# EAGLE board Remotuino-v2 (EAGLE 6.3)
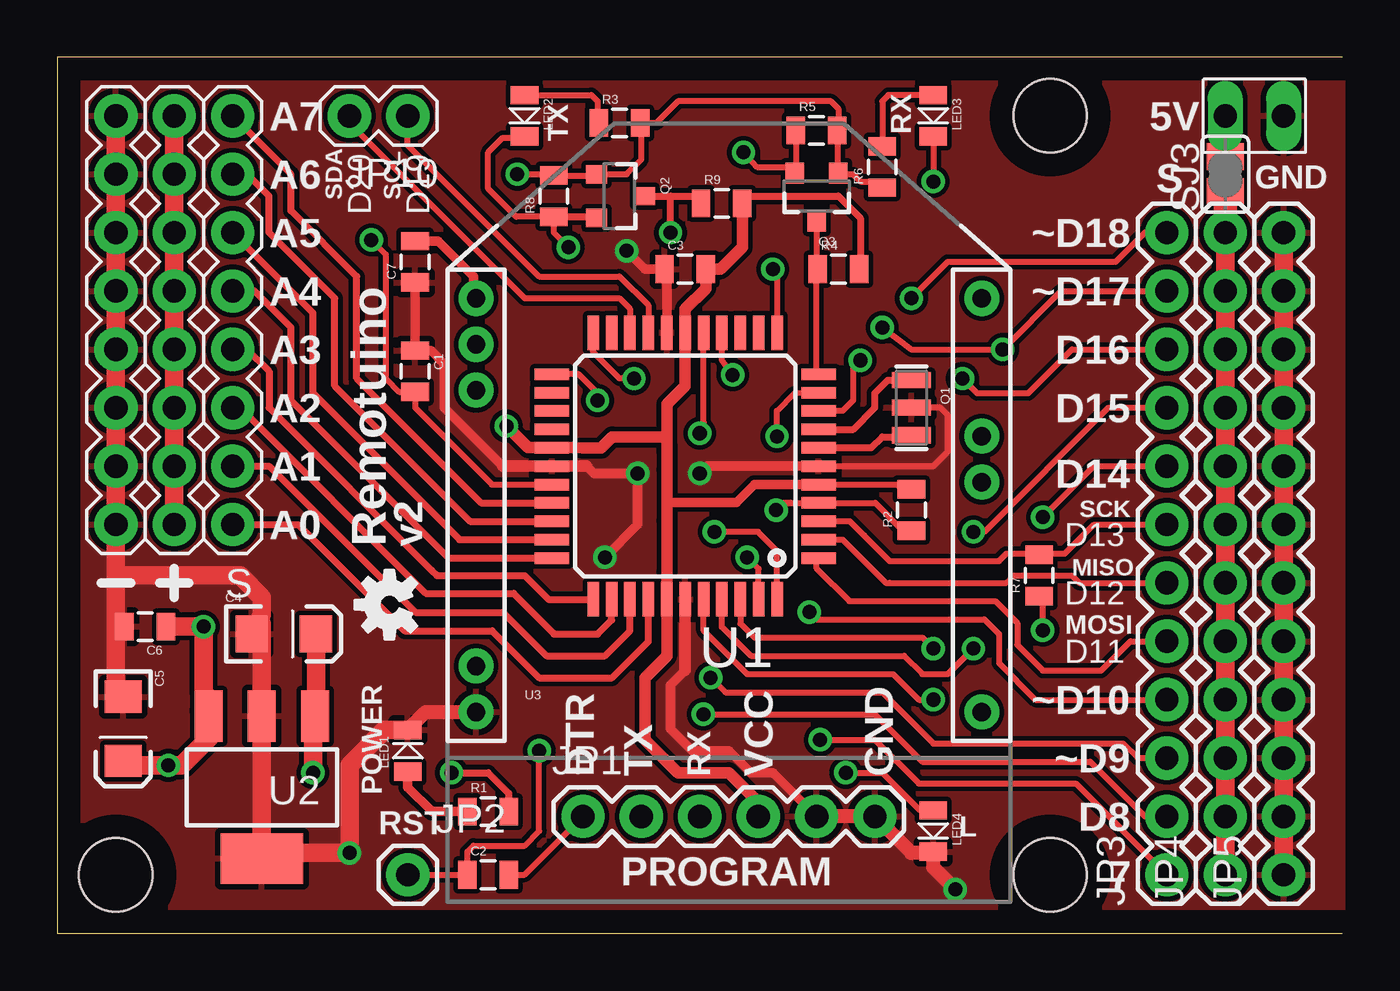
[diagram p0: board, top side]
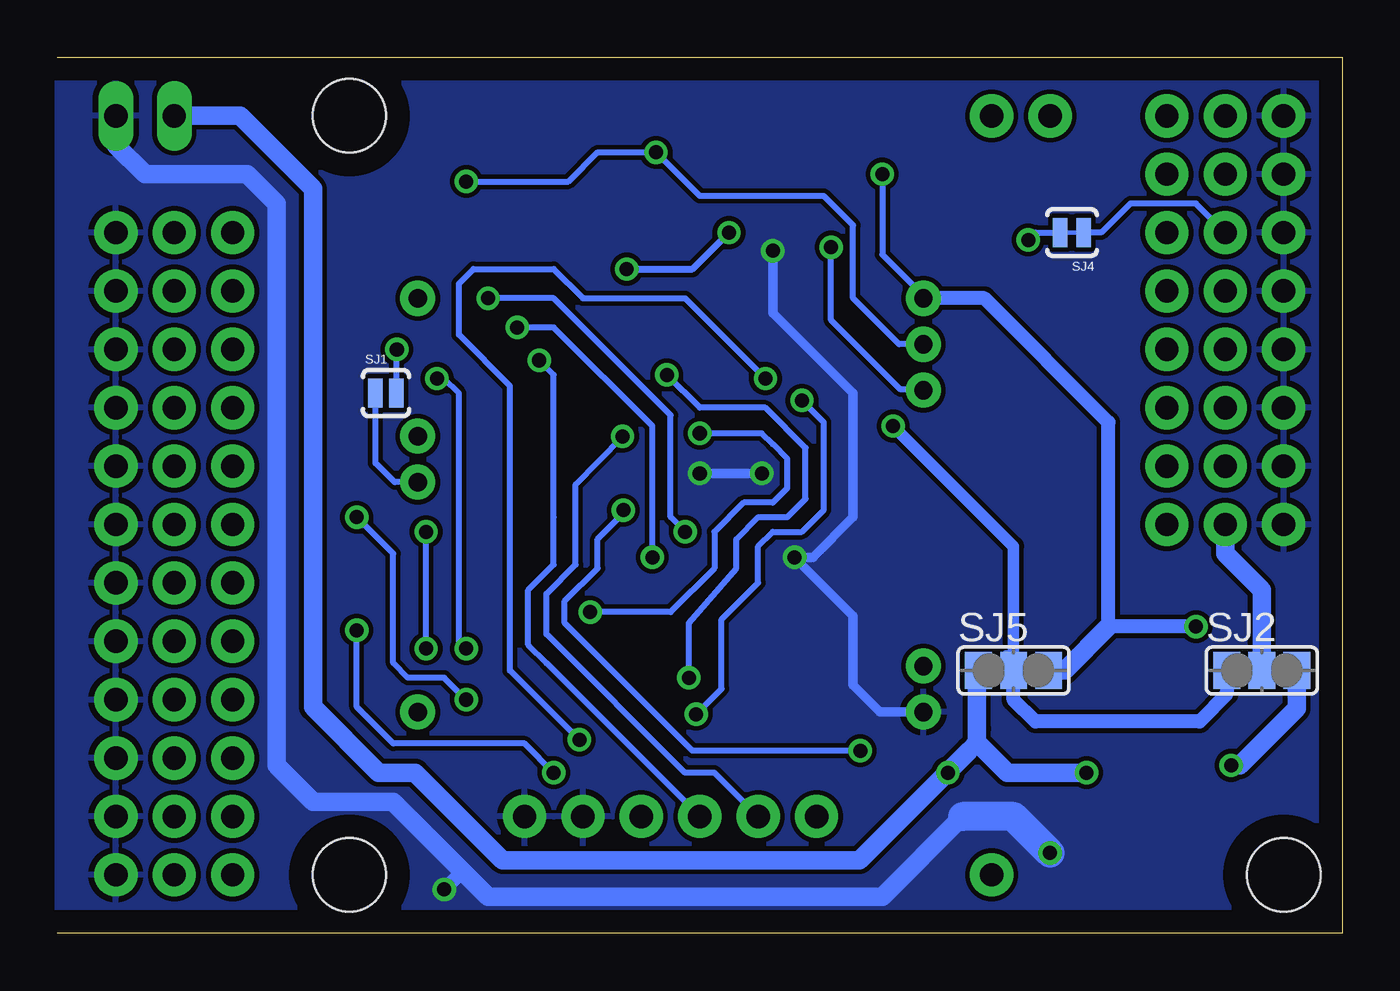
[diagram p1: board, bottom side, seen from below]

Size 55.88 x 38.1 mm. Coordinates in mm from the lower left corner, seen from the top.
Outline: 55.88,0 0,0 0,38.1 55.88,38.1
Copper layers (1*16): Top 0.035mm / dielectric 1.5mm / Bottom 0.035mm
Design rules "default *": minimum track width 10mil, minimum drill 24mil, track to track 8mil, track to pad 8mil, pad to pad 8mil, via to via 8mil, smd to smd 8mil, copper to edge 40mil, drill to drill 8mil, minimum pad ring 10mil, minimum via ring 8mil, stop-mask expansion 4mil, vias tented up to drill 0mil, thermal gap 10mil
Net classes: 0 default: width 0.203 mm; 1 vcc: width 0.254 mm
Holes 3.2 mm at 43.18,35.56 2.54,2.54 43.18,2.54

## Footprints (pad centres in the part's own frame; a part is rotated, then mirrored left to right if it is on the bottom)
0805 = smd 0.8 x 1.2: 1 -0.9,0; 2 0.9,0
EIA3216 = smd 1.4 x 1.6: A 1.4,0; C -1.4,0
1X06 = drill 1.016 pad 1.88: 1 0,0; 2 2.54,0; 3 5.08,0; 4 7.62,0; 5 10.16,0; 6 12.7,0
1X01 = drill 1.016 pad 1.88: 1 0,0
1X12 = drill 1.016 pad 1.88: 1 0,0; 2 2.54,0; 3 5.08,0; 4 7.62,0; 5 10.16,0; 6 12.7,0; 7 15.24,0; 8 17.78,0; 9 20.32,0; 10 22.86,0; 11 25.4,0; 12 27.94,0
1X08 = drill 1.016 pad 1.88: 1 0,0; 2 2.54,0; 3 5.08,0; 4 7.62,0; 5 10.16,0; 6 12.7,0; 7 15.24,0; 8 17.78,0
1X2_LONGPAD = drill 1.016 pad 1.245 long: 1 0,0; 2 -2.54,0
1X02 = drill 1.016 pad 1.88: 1 0,0; 2 2.54,0
LED-0805 = smd 0.8 x 1.2: 1 -0.9,0; 2 0.9,0
RESONATOR-SMD = smd 0.7 x 1.7: 1 -1.2,0; 2 0,0; 3 1.2,0
SOT23-3 = smd 0.8 x 0.9: 1 -0.95,-1; 2 0.95,-1; 3 0,1.1
SJ_2S-NO = smd 0.635 x 1.27: 1 -0.45,0; 2 0.45,0
SJ_2WAYS_1-2 = smd 1.168 x 1.6: 1 -1.524,0; 2 0,0; 3 1.524,0
SJ = smd 1.168 x 1.6: 1 -0.762,0; 2 0.762,0
SJ_2S-TRACE = smd 0.635 x 1.27: 1 -0.508,0; 2 0.508,0
TQFP44 = smd 1.5 x 0.5: 1 -5.8,4; 2 -5.8,3.2; 3 -5.8,2.4; 4 -5.8,1.6; 5 -5.8,0.8; 6 -5.8,0; 7 -5.8,-0.8; 8 -5.8,-1.6; 9 -5.8,-2.4; 10 -5.8,-3.2; 11 -5.8,-4; 23 5.8,-4; 24 5.8,-3.2; 25 5.8,-2.4; 26 5.8,-1.6; 27 5.8,-0.8; 28 5.8,0; 29 5.8,0.8; 30 5.8,1.6; 31 5.8,2.4; 32 5.8,3.2; 33 5.8,4 | smd 0.5 x 1.5: 12 -4,-5.8; 13 -3.2,-5.8; 14 -2.4,-5.8; 15 -1.6,-5.8; 16 -0.8,-5.8; 17 0,-5.8; 18 0.8,-5.8; 19 1.6,-5.8; 20 2.4,-5.8; 21 3.2,-5.8; 22 4,-5.8; 34 4,5.8; 35 3.2,5.8; 36 2.4,5.8; 37 1.6,5.8; 38 0.8,5.8; 39 0,5.8; 40 -0.8,5.8; 41 -1.6,5.8; 42 -2.4,5.8; 43 -3.2,5.8; 44 -4,5.8
SOT223 = smd 1.219 x 2.235: 1 -2.311,-3.099; 2 0,-3.099; 3 2.311,-3.099 | smd 3.6 x 2.2: 4 0,3.099
XBEE-MIN = drill 0.8 pad 1.524: 1 -11,20; 2 -11,18; 3 -11,16; 5 -11,4; 10 -11,2; 11 11,2; 16 11,12; 17 11,14; 20 11,20

## Placement (x,y rotation side)
C1  0.1uF  [0805]  15.56,24.45 270 top
C2  0.1uF  [0805]  18.73,2.54 0 top
C3  0.1uF  [0805]  27.3,28.89 0 top
C4  10uF  [EIA3216]  9.84,13.02 0 top
C5  10uF  [EIA3216]  2.86,8.89 270 top
C6  0.1uF  [0805]  3.81,13.34 180 top
C7  0.1uF  [0805]  15.56,29.21 90 top
JP1  FTDI Basic  [1X06]  22.86,5.08 0 top
JP2  RESET  [1X01]  15.24,2.54 0 top
JP3  M12  [1X12]  48.26,2.54 90 top
JP4  [1X12]  50.8,2.54 90 top
JP5  M12  [1X12]  53.34,2.54 90 top
JP6  M8  [1X08]  7.62,17.78 90 top
JP7  M8  [1X08]  5.08,17.78 90 top
JP8  M8  [1X08]  2.54,17.78 90 top
JP9  [1X2_LONGPAD]  53.34,35.56 0 top
JP10  [1X02]  15.24,35.56 180 top
LED1  Red  [LED-0805]  15.24,7.94 90 top
LED2  Green  [LED-0805]  20.32,35.56 270 top
LED3  Red  [LED-0805]  38.1,35.56 270 top
LED4  Red  [LED-0805]  38.1,4.45 270 top
Q1  16MHz  [RESONATOR-SMD]  37.15,22.86 270 top
Q2  BSS138  [SOT23-3]  24.45,32.07 270 top
Q3  BSS138  [SOT23-3]  33.02,32.07 180 top
R1  10K  [0805]  18.73,5.3 0 top
R2  10K  [0805]  37.15,18.41 90 top
R3  1K  [0805]  24.45,35.24 0 top
R4  1K  [0805]  33.97,28.89 0 top
R5  1K  [0805]  33.02,34.92 0 top
R6  1K  [0805]  35.88,33.34 90 top
R7  1K  [0805]  42.7,15.56 90 top
R8  1K  [0805]  21.59,32.07 90 top
R9  1K  [0805]  28.89,31.75 0 top
SJ1  [SJ_2S-NO]  41.59,23.5 0 bottom
SJ2  [SJ_2WAYS_1-2]  3.49,11.43 0 bottom
SJ3  [SJ]  50.8,33.02 90 top
SJ4  .  [SJ_2S-TRACE]  11.75,30.48 180 bottom
SJ5  [SJ_2WAYS_1-2]  14.29,11.43 0 bottom
U1  ATMEGA324P  [TQFP44]  27.3,20.32 180 top
U2  MIC5209-3.3YS  [SOT223]  8.89,6.35 180 top
U3  XBEE  [XBEE-MIN]  29.21,7.62 0 top
U$2  OSHW-LOGOS  [OSHW-LOGO-S]  14.45,14.29 90 top

## Library data of the parts
C1-C7 JP1-JP5 Q1 R1-R9 SJ1 SJ4 U$2 = SparkFun
JP6-JP10 LED1-LED4 SJ2 SJ3 SJ5 U1-U3 = wibauxl
Q2 Q3 = SparkFun-DiscreteSemi

## Nets
3.3V: C5.A C6.1 C7.2 Q2.1 Q3.1 R3.2 R5.2 R6.1 R8.2 SJ2.3 SJ5.3 U2.3 U3.1
A0/D24: JP6.1 U1.37
A1/D25: JP6.2 U1.36
A2/D26: JP6.3 U1.35
A3/D27: JP6.4 U1.34
A4/D28: JP6.5 U1.33
A5/D29: JP6.6 U1.32
A6/D30: JP6.7 U1.31
A7/D31: JP6.8 U1.30
AREF: C1.2 SJ4.2 U1.29
D0/RX: JP1.3 U1.9
D1/TX: JP1.2 U1.10
D2/RX2: Q3.3 R4.1 U1.11
D3/TX2: Q2.3 R9.1 U1.12
D4: U1.21
D5: U1.13
D6: U1.14
D7: JP3.1 U1.22
D8: JP3.2 U1.23
D9: JP3.3 U1.15
D10: JP3.4 U1.16
D11/MOSI: JP3.5 U1.1
D12/MISO: JP3.6 U1.2
D13/SCK: JP3.7 R7.2 U1.3
D14: JP3.8 U1.40
D15: JP3.9 U1.41
D16: JP3.10 U1.42
D17: JP3.11 SJ1.2 U1.43
D18: JP3.12 U1.44
D19/SCL: JP10.1 U1.19
D20/SDA: JP10.2 U1.20
D21: U1.24
D22: U1.25
D23: U1.26
DTR: C2.2 JP1.1
GND [vcc]: C1.1 C3.1 C4.C C5.C C6.2 C7.1 JP1.5 JP1.6 JP5.1 JP5.2 JP5.3 JP5.4 JP5.5 JP5.6 JP5.7 JP5.8 JP5.9 JP5.10 JP5.11 JP5.12 JP8.1 JP8.2 JP8.3 JP8.4 JP8.5 JP8.6 JP8.7 JP8.8 JP9.1 LED1.2 LED4.2 Q1.2 U1.6 U1.18 U1.28 U1.39 U2.2 U2.4 U3.10
N$1: Q1.1 U1.8
N$2: Q1.3 U1.7
N$3: LED2.1 R3.1
N$4: LED3.1 R6.2
N$5: LED4.1 R7.1
N$38: LED1.1 R1.1
RESET: C2.1 JP2.1 R2.1 U1.4
RTS: SJ1.1 U3.16
V+ [vcc]: JP4.1 JP4.2 JP4.3 JP4.4 JP4.5 JP4.6 JP4.7 JP4.8 JP4.9 JP4.10 JP4.11 JP4.12 SJ3.1
VAN: JP7.1 JP7.2 JP7.3 JP7.4 JP7.5 JP7.6 JP7.7 JP7.8 SJ2.2 SJ4.1
VCC [vcc]: C3.2 JP1.4 R2.2 R4.2 R9.2 SJ2.1 SJ5.2 U1.5 U1.17 U1.27 U1.38
VIN: C4.A JP9.2 R1.2 SJ3.2 SJ5.1 U2.1
X_RX: LED2.2 Q2.2 R8.1 U3.3
X_TX: LED3.2 Q3.2 R5.1 U3.2

## Tracks (layer width: path | path; a pad name or v marks a point on that pad's centre or on a via)
3.3V  (via drill 0.61)
  Top 0.254: 36.14,32.33 R6.1 36.14,32.38 35.88,32.38 35.56,32.7 34.92,32.7 34.61,33.02 34.02,33.02 Q3.1 33.92,32.8 R5.2 33.97,34.66 33.97,35.88 33.66,36.2 26.99,36.2 26.04,35.24 R3.2 25.4,35.19 25.4,33.66 24.76,33.02 Q2.1 23.45,32.97 R8.2 21.59,33.02 v20,33.02
  Top 0.406: C7.2 16.56,30.11 18.1,28.57 18.1,27.73 U3.1
  Top 0.61: C5.A 3.04,7.36
  Top 0.813: 3.04,7.36 3.12,7.36 3.17,7.3 v4.83,7.3 5.4,7.3 6.66,8.56 6.66,8.57 U2.3 6.35,9.68 6.67,10.16 6.35,10.48 v6.35,13.34 C6.1
  Bottom 0.254: 18.1,27.62 U3.1 18.21,27.73 20,29.53 v20,33.02
  Bottom 0.61: 18.1,27.62 15.56,27.62 10.16,22.23 10.16,13.34 v6.35,13.34
  Bottom 0.813: SJ2.3 1.97,9.78 4.45,7.3 v4.83,7.3 | SJ5.3 12.06,11.43 10.16,13.34
A0/D24
  Top 0.305: U1.37 25.7,12.69 24.13,11.11 20.95,11.11 18.91,13.16 15.1,13.16 10.48,17.78 JP6.1
A1/D25
  Top 0.305: U1.36 24.91,13.16 23.81,12.06 21.27,12.06 19.38,13.96 15.57,13.96 9.21,20.32 JP6.2
A2/D26
  Top 0.305: U1.35 24.11,13.63 23.5,13.02 21.59,13.02 21.59,13.04 19.85,14.78 16.02,14.78 7.94,22.86 JP6.3
A3/D27
  Top 0.305: U1.34 21.36,14.52 20.32,15.56 16.51,15.56 16.28,15.79 9.21,22.86 9.21,24.45 8.26,25.4 JP6.4
A4/D28
  Top 0.305: U1.33 17.02,16.32 10.16,23.18 10.16,26.35 8.57,27.94 JP6.5
A5/D29
  Top 0.305: U1.32 17.49,17.12 11.11,23.5 11.11,26.99 JP6.6
A6/D30
  Top 0.305: U1.31 17.96,17.92 12.06,23.81 12.06,27.62 9.21,30.48 9.21,32.07 8.26,33.02 JP6.7
A7/D31
  Top 0.305: U1.30 18.43,18.72 13.02,24.13 13.02,28.57 10.16,31.43 10.16,33.02 JP6.8
AREF  (via drill 0.61)
  Top 0.254: U1.29 18.9,19.52 15.56,22.86 C1.2 14.87,23.55 14.29,24.13 14.29,29.53 v13.65,30.16
  Bottom 0.254: SJ4.2 13.34,30.48 v13.65,30.16
D0/RX  (via drill 0.61)
  Top 0.254: U1.9 34.15,22.72 34.29,22.86 | 34.29,22.86 | 34.29,22.86 34.61,23.18 34.61,24.61 v34.92,24.92
  Bottom 0.254: v34.92,24.92 34.29,24.29 34.29,18.1 34.29,16.03 35.4,14.92 35.4,12.54 34.61,11.75 JP1.3
D1/TX  (via drill 0.61)
  Top 0.254: v31.3,21.61 31.3,22.73 32.07,23.5 U1.10
  Bottom 0.254: JP1.2 27.3,6.99 28.57,6.99 34.61,13.02 34.61,14.76 33.34,16.03 33.34,19.53 v31.3,21.61
D2/RX2
  Top 0.254: U1.11 33.02,24.45 | 33.21,24.32 33.02,24.45 | 33.02,24.45 33.02,28.84 R4.1 33.34,28.95 33.02,29.21 Q3.3
D3/TX2  (via drill 0.61)
  Top 0.254: U1.12 31.3,28.77 v31.11,28.89
  Top 0.305: Q2.3 26.67,32.07 | 26.67,32.07 27.68,32.07 R9.1 | v26.67,30.48 26.67,32.07
  Bottom 0.305: v31.11,28.89 28.26,28.89 v26.67,30.48
D7  (via drill 0.61)
  Top 0.254: JP3.1 44.29,6.51 37.47,6.51 35.56,8.41 v33.18,8.41 | U1.22 23.3,25.27 24.45,24.13 v25.08,24.13
  Bottom 0.254: v33.18,8.41 36.2,11.43 36.2,23.81 38.42,26.04 38.42,28.26 37.78,28.89 34.29,28.89 33.02,27.62 28.57,27.62 v25.08,24.13
D8  (via drill 0.61)
  Top 0.254: v28.1,9.53 35.56,9.53 37.62,7.46 44.93,7.46 47.31,5.08 JP3.2 | U1.23 22.67,24.32 23.5,23.5 v23.5,23.18
  Bottom 0.254: v23.5,23.18 22.54,22.23 22.54,18.41 23.5,17.46 24.77,17.46 25.4,16.83 25.4,15.24 26.99,13.65 26.99,10.64 v28.1,9.53
D9  (via drill 0.61)
  Top 0.254: v28.42,11.11 29.05,10.48 35.88,10.48 38.1,8.26 46.35,8.26 46.99,7.62 JP3.3 | U1.15 28.91,24.94 v29.37,24.29
  Bottom 0.254: v29.37,24.29 27.94,22.86 25.08,22.86 23.34,21.11 23.34,18.89 24.13,18.1 25.4,18.1 26.35,17.14 26.35,15.88 28.42,13.49 v28.42,11.11
D10  (via drill 0.61)
  Top 0.254: v32.7,13.97 33.02,13.65 40.32,13.65 40.96,13.02 40.96,11.75 42.55,10.16 JP3.4 | U1.16 28.11,22.23 28.1,22.07 28.1,21.91 v27.94,21.75
  Bottom 0.254: v32.7,13.97 29.21,13.97 27.3,15.88 27.3,17.46 26.04,18.73 24.77,18.73 24.13,19.37 24.13,20.64 24.77,21.27 25.24,21.75 v27.94,21.75
D11/MOSI
  Top 0.254: 33.21,16.32 U1.1 33.02,16.23 33.02,15.88 34.45,14.45 40.8,14.45 41.75,13.49 41.75,12.54 42.86,11.43 45.4,11.43 46.67,12.7 JP3.5
D12/MISO
  Top 0.254: U1.2 34.16,17.12 34.45,16.83 35.4,15.88 36.04,15.24 36.2,15.24 41.27,15.24 41.59,15.56 44.13,15.56 44.45,15.24 48.1,15.24 JP3.6
D13/SCK
  Top 0.254: U1.3 34.47,17.92 35.08,17.3 36.2,16.19 40.96,16.19 41.27,16.51 43.18,16.51 | 43.18,16.51 43.81,16.51 45.09,17.78 JP3.7 | 43.18,16.51 R7.2
D14  (via drill 0.61)
  Top 0.254: U1.40 28.11,13.17 30,11.27 36.35,11.27 37.47,10.16 v38.1,10.16 | JP3.8 45.09,20.32 v42.86,18.1
  Bottom 0.254: v38.1,10.16 39.05,11.11 40.64,11.11 41.27,11.75 41.27,16.51 v42.86,18.1
D15  (via drill 0.61)
  Top 0.254: U1.41 28.91,13.32 30.16,12.06 36.83,12.06 37.62,11.27 38.73,11.27 v39.85,12.38 | JP3.9 45.72,22.86 40.32,17.46 v39.85,17.46
  Bottom 0.254: v39.85,12.38 v39.85,17.46
D16  (via drill 0.61)
  Top 0.254: U1.42 29.7,13.47 30.32,12.86 37.62,12.86 v38.1,12.38 | v39.37,24.13 40.01,23.5 42.23,23.5 44.13,25.4 JP3.10
  Bottom 0.254: v38.1,12.38 38.42,12.7 38.42,23.5 39.05,24.13 v39.37,24.13
D17  (via drill 0.61)
  Top 0.254: U1.43 30.5,15.85 30.16,16.19 v30,16.35 | v35.88,26.35 37.15,25.4 v41.12,25.4 43.66,27.94 JP3.11
  Bottom 0.254: v30,16.35 30,17.3 30,20.32 | 30,20.32 | 30,20.32 30,22.07 34.29,26.35 v35.88,26.35 | 41.14,25.27 41.27,25.4 v41.12,25.4 41.14,25.37 SJ1.2
D18  (via drill 0.61)
  Top 0.254: U1.44 31.3,16.64 30.48,17.46 v28.57,17.46 | v37.15,27.62 38.73,29.21 46.04,29.21 47.31,30.48 JP3.12
  Bottom 0.254: v28.57,17.46 29.21,18.1 29.21,22.54 34.29,27.62 v37.15,27.62
D19/SCL
  Top 0.254: U1.19 25.7,27.32 24.45,28.57 20.95,28.57 15.24,34.29 JP10.1
D20/SDA
  Top 0.254: U1.20 24.91,27.16 24.45,27.62 20.32,27.62 12.7,35.24 JP10.2
DTR
  Top 0.254: JP1.1 20.32,2.54 C2.2
GND  (via drill 0.61)
  Top 0.254: C3.1 26.5,28.79 | U1.6 38.1,20.32 38.73,20.95 38.73,22.54 38.42,22.86 Q1.2 | 16.25,25.35 16.19,25.4 15.56,25.4
  Top 0.305: JP8.1 2.54,15.88 2.86,15.56 2.54,15.56 2.54,13.71 C6.2 | 2.91,10.43 2.91,10.34 C5.C
  Top 0.406: C1.1 16.25,25.35 16.83,24.77 16.83,22.86 19.37,20.32 | v27.94,20 28.26,20.32 U1.6 | 23.02,20.32 23.34,20 v25.24,20 25.24,17.78 v23.81,16.35 | 27.3,11.43 26.67,10.79 26.67,8.89 27.62,7.94 29.21,7.94 30.16,6.99 31.11,6.99 JP1.5 | U1.18 26.5,28.74 26.35,28.89 26.35,28.84 C3.1 25.56,28.89 v24.77,29.69 | 15.56,25.4 C7.1
  Top 0.508: 19.37,20.32 U1.28 23.02,20.32 | 27.3,11.43 U1.39
  Top 0.61: JP1.5 JP1.6 37.15,3.49 38.05,3.49 LED4.2 38.1,2.86 v39.05,1.91 | LED1.2 16.02,9.62 U3.10
  Top 0.813: JP5.12 JP5.11 JP5.10 JP5.9 JP5.8 JP5.7 JP5.6 JP5.5 JP5.4 JP5.3 JP5.2 JP5.1 | JP8.8 JP8.7 JP8.6 JP8.5 JP8.4 JP8.3 JP8.2 JP8.1 2.54,15.56 2.54,10.79 2.91,10.43 | C6.2 2.86,13.28 | 2.65,15.56 2.86,15.56 7.94,15.56 8.89,14.61 8.89,13.84 C4.C 8.89,13.46 U2.2 8.89,3.49 | U2.4 8.89,3.49 | 8.89,3.49 v12.7,3.49 12.7,7.3 14.23,8.84 LED1.2
  Bottom 0.406: 38.42,2.54 38.58,3.02 | v25.24,20 v27.94,20 | v24.77,29.69 24.77,26.99 21.27,23.5 21.27,18.1 23.02,16.35 v23.81,16.35 21.27,13.81 21.27,10.79 20.1,9.62 U3.10
  Bottom 0.61: 38.42,2.54 v39.05,1.91
  Bottom 0.813: 53.34,34.29 52.07,33.02 47.62,33.02 46.35,31.75 46.35,7.3 44.77,5.71 41.27,5.71 38.58,3.02 37.15,1.59 20,1.59 16.51,5.08
  Bottom 1.27: v12.7,3.49 14.29,5.08 16.51,5.08
  pour Bottom: 0,38.1 55.88,38.1 55.88,0 0,0
  pour Top: 0,38.1 55.88,38.1 55.88,0 0,0
N$1
  Top 0.305: Q1.1 36.12,24.06 35.56,23.5 35.56,22.86 34.62,21.92 U1.8
N$2
  Top 0.305: U1.7 35.41,21.12 35.88,21.59 36.76,21.59 Q1.3
N$3
  Top 0.254: LED2.1 23.23,36.46 23.5,36.2 23.5,35.3 R3.1
N$4
  Top 0.254: LED3.1 36.14,36.46 35.88,36.2 R6.2
N$5  (via drill 0.61)
  Top 0.254: R7.1 42.86,14.61 42.86,13.34 v42.86,13.18 | LED4.1 37.52,5.34 35.88,6.99 v34.29,6.99
  Bottom 0.254: v42.86,13.18 42.86,13.02 42.86,9.84 41.27,8.26 35.56,8.26 v34.29,6.99
N$38
  Top 0.406: LED1.1 15.24,6.35 16.29,5.3 R1.1
RESET  (via drill 0.61)
  Top 0.254: R2.1 37.09,17.46 36.83,17.46 35.57,18.72 U1.4 31.76,18.72 31.91,18.73 31.59,18.73 v31.26,18.4 | JP2.1 C2.1 17.83,3.54 18.1,3.81 20.32,3.81 20.95,4.45 v20.95,7.94
  Bottom 0.254: v20.95,7.94 28.26,7.94 32.7,12.38 33.81,13.49 33.81,14.45 32.38,15.88 32.38,17.14 31.13,18.4 v31.26,18.4
RTS
  Bottom 0.254: SJ1.1 42.04,20.45 41.21,19.62 U3.16
V+
  Top 0.813: JP4.12 JP4.11 JP4.10 JP4.9 JP4.8 JP4.7 JP4.6 JP4.5 JP4.4 JP4.3 JP4.2 JP4.1
  Top 1.016: SJ3.1 JP4.12
VAN
  Top 0.813: JP7.8 JP7.7 JP7.6 JP7.5 JP7.4 JP7.3 JP7.2 JP7.1
  Bottom 0.254: JP7.6 6.35,31.75 9.21,31.75 10.48,30.48 SJ4.1
  Bottom 0.305: 5.08,16.51 5.21,16.64
  Bottom 0.813: 5.08,16.83 JP7.1 5.08,16.51 3.49,14.92 SJ2.2
VCC  (via drill 0.61)
  Top 0.254: U1.5 36.68,19.52 36.83,19.37 37.15,19.37 | R4.2 34.92,28.89 34.92,29.84 | R9.2 29.53,31.75
  Top 0.305: 29.79,32.07 33.97,32.07 34.92,31.11 34.92,28.95 R4.2
  Top 0.406: U1.5 30.63,19.52 30.32,19.53 29.53,18.73 26.51,18.73 26.51,19.53 26.51,20.16 | 36.68,19.52 36.68,19.47 R2.2
  Top 0.508: v19.53,22.07 20.47,21.12 U1.27 22.38,21.12 22.85,21.11 23.65,21.11 24.13,21.59 26.51,21.59 | JP1.4 30.48,5.71 29.21,6.99 26.99,6.99 25.55,8.42 25.55,11.11 26.51,12.06 U1.38 26.5,15.72 26.51,17.94 26.51,20.16 26.51,21.27 | 26.51,21.27 26.51,20.95 | 26.51,21.27 26.51,21.59 | 26.51,21.59 26.51,23.02 27.3,23.81 U1.17 27.3,27.15 28.2,28.05 C3.2 28.84,28.89 29.79,29.84 R9.2 29.79,32.07
  Bottom 0.508: 14.61,12.06 SJ5.2 14.29,16.83 v19.53,22.07
  Bottom 0.61: SJ5.2 14.29,10.16 13.34,9.21 6.19,9.21 5.02,10.41 SJ2.1
VIN  (via drill 0.61)
  Top 0.305: R1.2 19.63,6.08 18.73,6.99 v17.14,6.99
  Top 0.813: 11.24,10.12 C4.A | 11.24,10.12 U2.1 | 11.24,10.12 11.39,10.12 11.11,9.84 v11.11,6.99
  Top 1.016: SJ3.2 JP9.2
  Bottom 0.305: v17.14,6.99 17.14,7.02 16.21,7.96
  Bottom 0.61: SJ5.1 15.81,11.68 15.88,11.43 15.88,11.75
  Bottom 0.813: 15.87,8.29 15.88,8.89 15.88,11.43 | 15.87,8.29 16.21,7.96 20.99,3.17 36.51,3.17 40.32,6.99 41.91,6.99 44.77,9.84 44.77,32.38 47.94,35.56 JP9.2 | v11.11,6.99 14.56,6.99 15.87,8.29
X_RX  (via drill 0.61)
  Top 0.254: v22.23,29.84 21.59,30.48 R8.1 19.95,31.17 18.73,32.38 18.73,33.97 19.37,34.61 20.32,34.61 LED2.2
  Top 0.305: R8.1 23.4,31.17 Q2.2
  Bottom 0.254: U3.3 18.24,23.65 19.21,23.65 22.23,26.67 v22.23,29.84
X_TX  (via drill 0.61)
  Top 0.254: R5.1 32.12,33.44 Q3.2 32.07,33.34 30.43,33.34 v29.84,33.97 | LED3.2 38.15,34.66 38.1,34.29 v38.1,32.7
  Bottom 0.254: U3.2 19.27,25.62 21.27,27.62 21.27,30.8 22.54,32.07 27.94,32.07 v29.84,33.97 32.38,33.97 33.66,32.7 v38.1,32.7

## Text on the board
tPlace: 5V | A7 | RX | TX | A6 | SDA | SCL | S | GND | D20 | D19 | ~D18 | A5 | ~D17 | A4 | D16 | A3 | D15 | A2 | D14 | A1 | SCK | A0 | Remotuino | v2 | D13 | MISO | S | D12 | MOSI | D11 | ~D10 | ~D9 | DTR | TX | RX | VCC | GND | POWER | D8 | L | RST | PROGRAM | 7